# Altium PCB TDA7292 Amplifier.PcbDoc
Units mm, origin at the board's own origin, x right, y up, seen from the top; angles counter-clockwise.
Board outline 100 x 100 mm, 2 copper layers (Top Layer, Bottom Layer), stack 1.57 mm thick; 42 components, 25 nets, 95 pads, 2 vias.
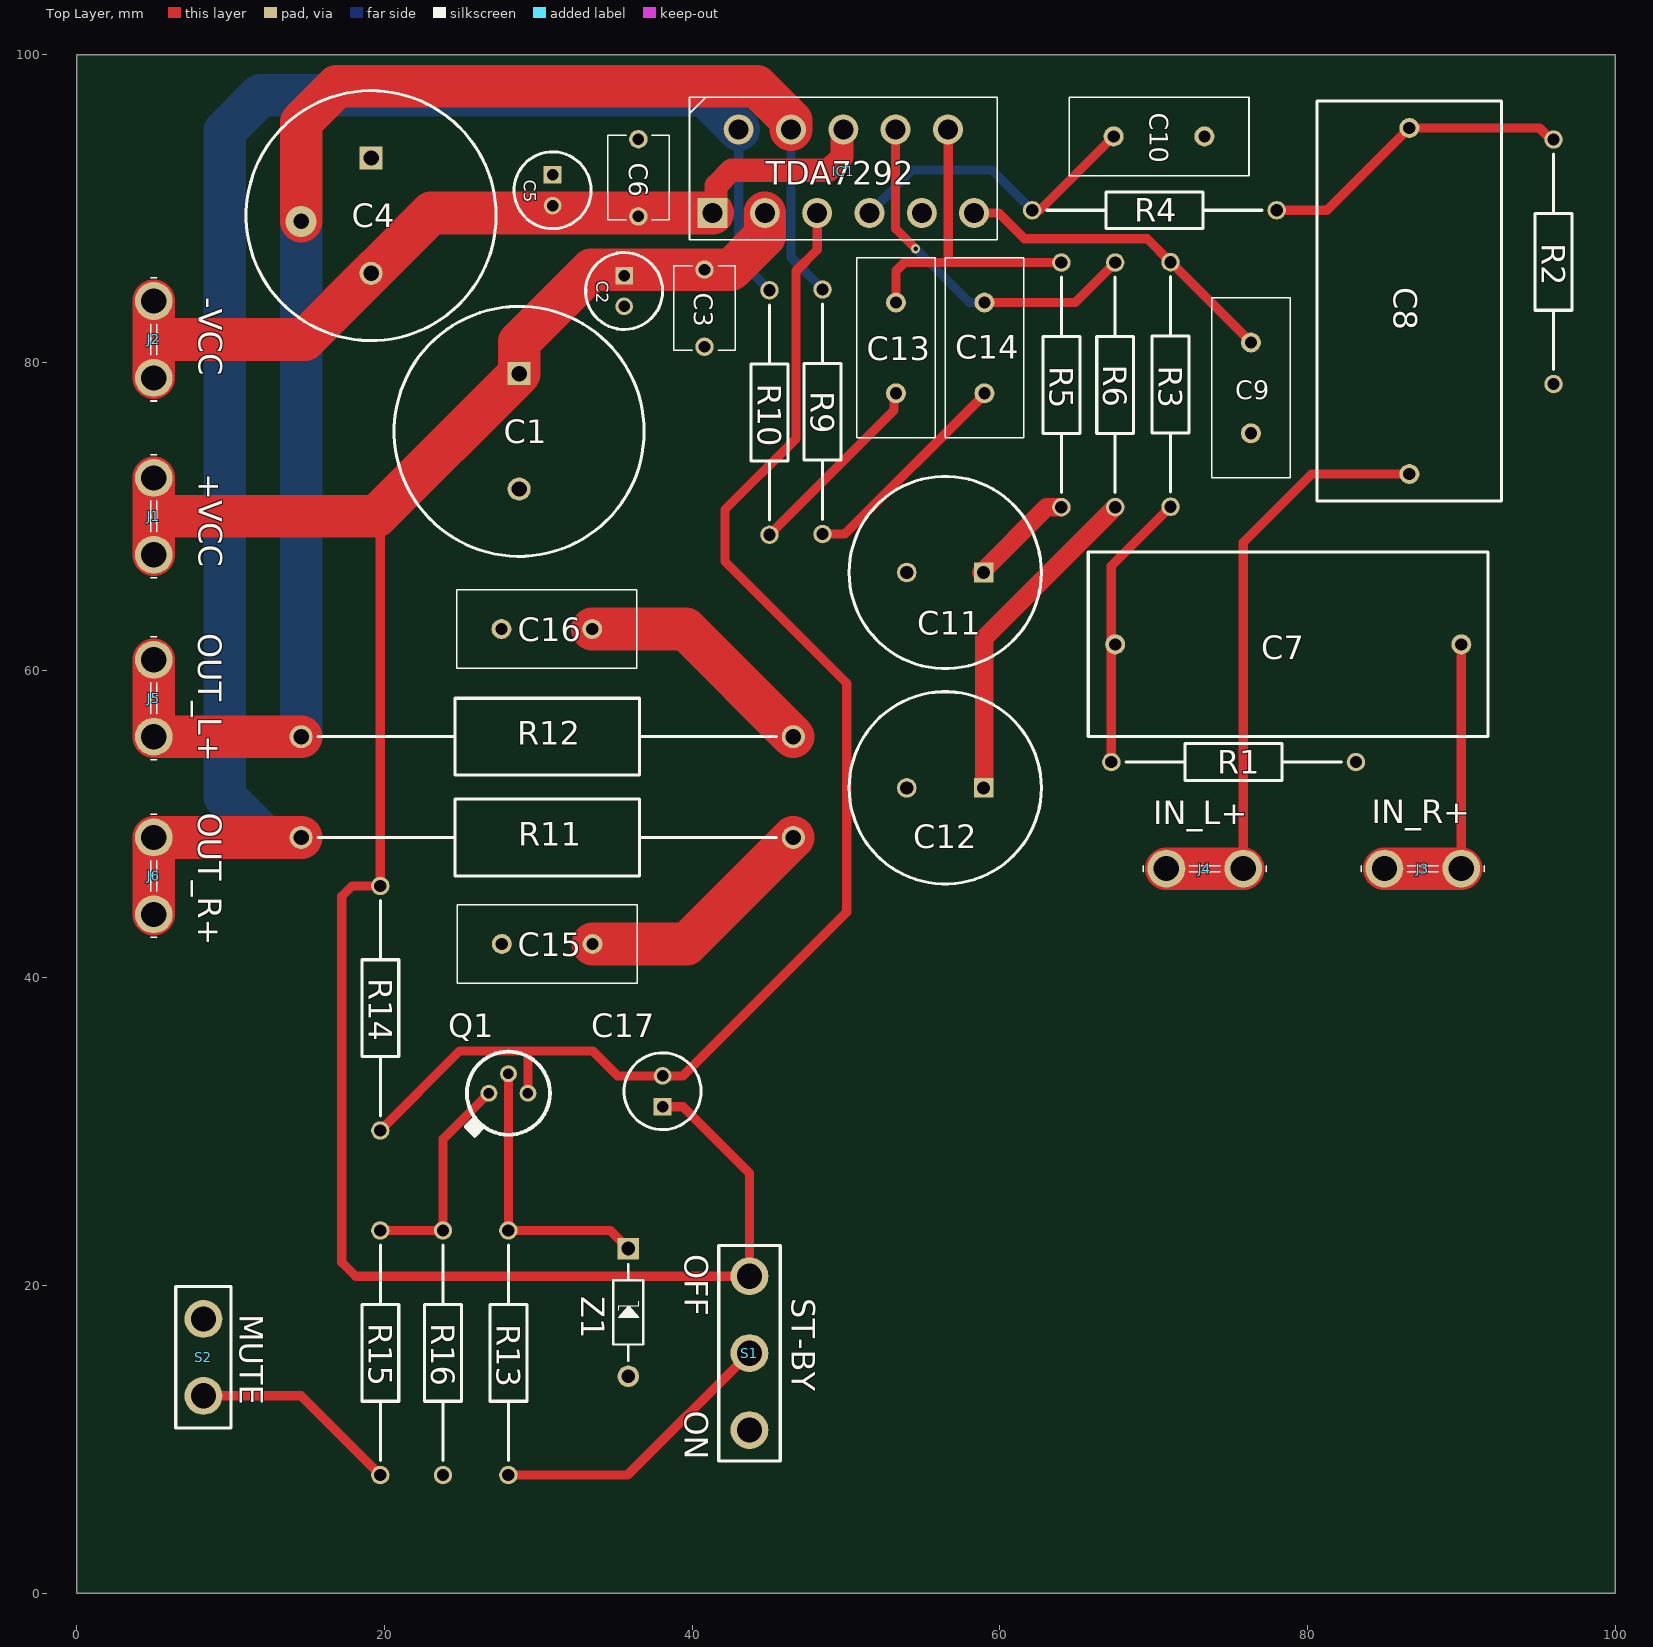
[diagram p0: Top Layer view]
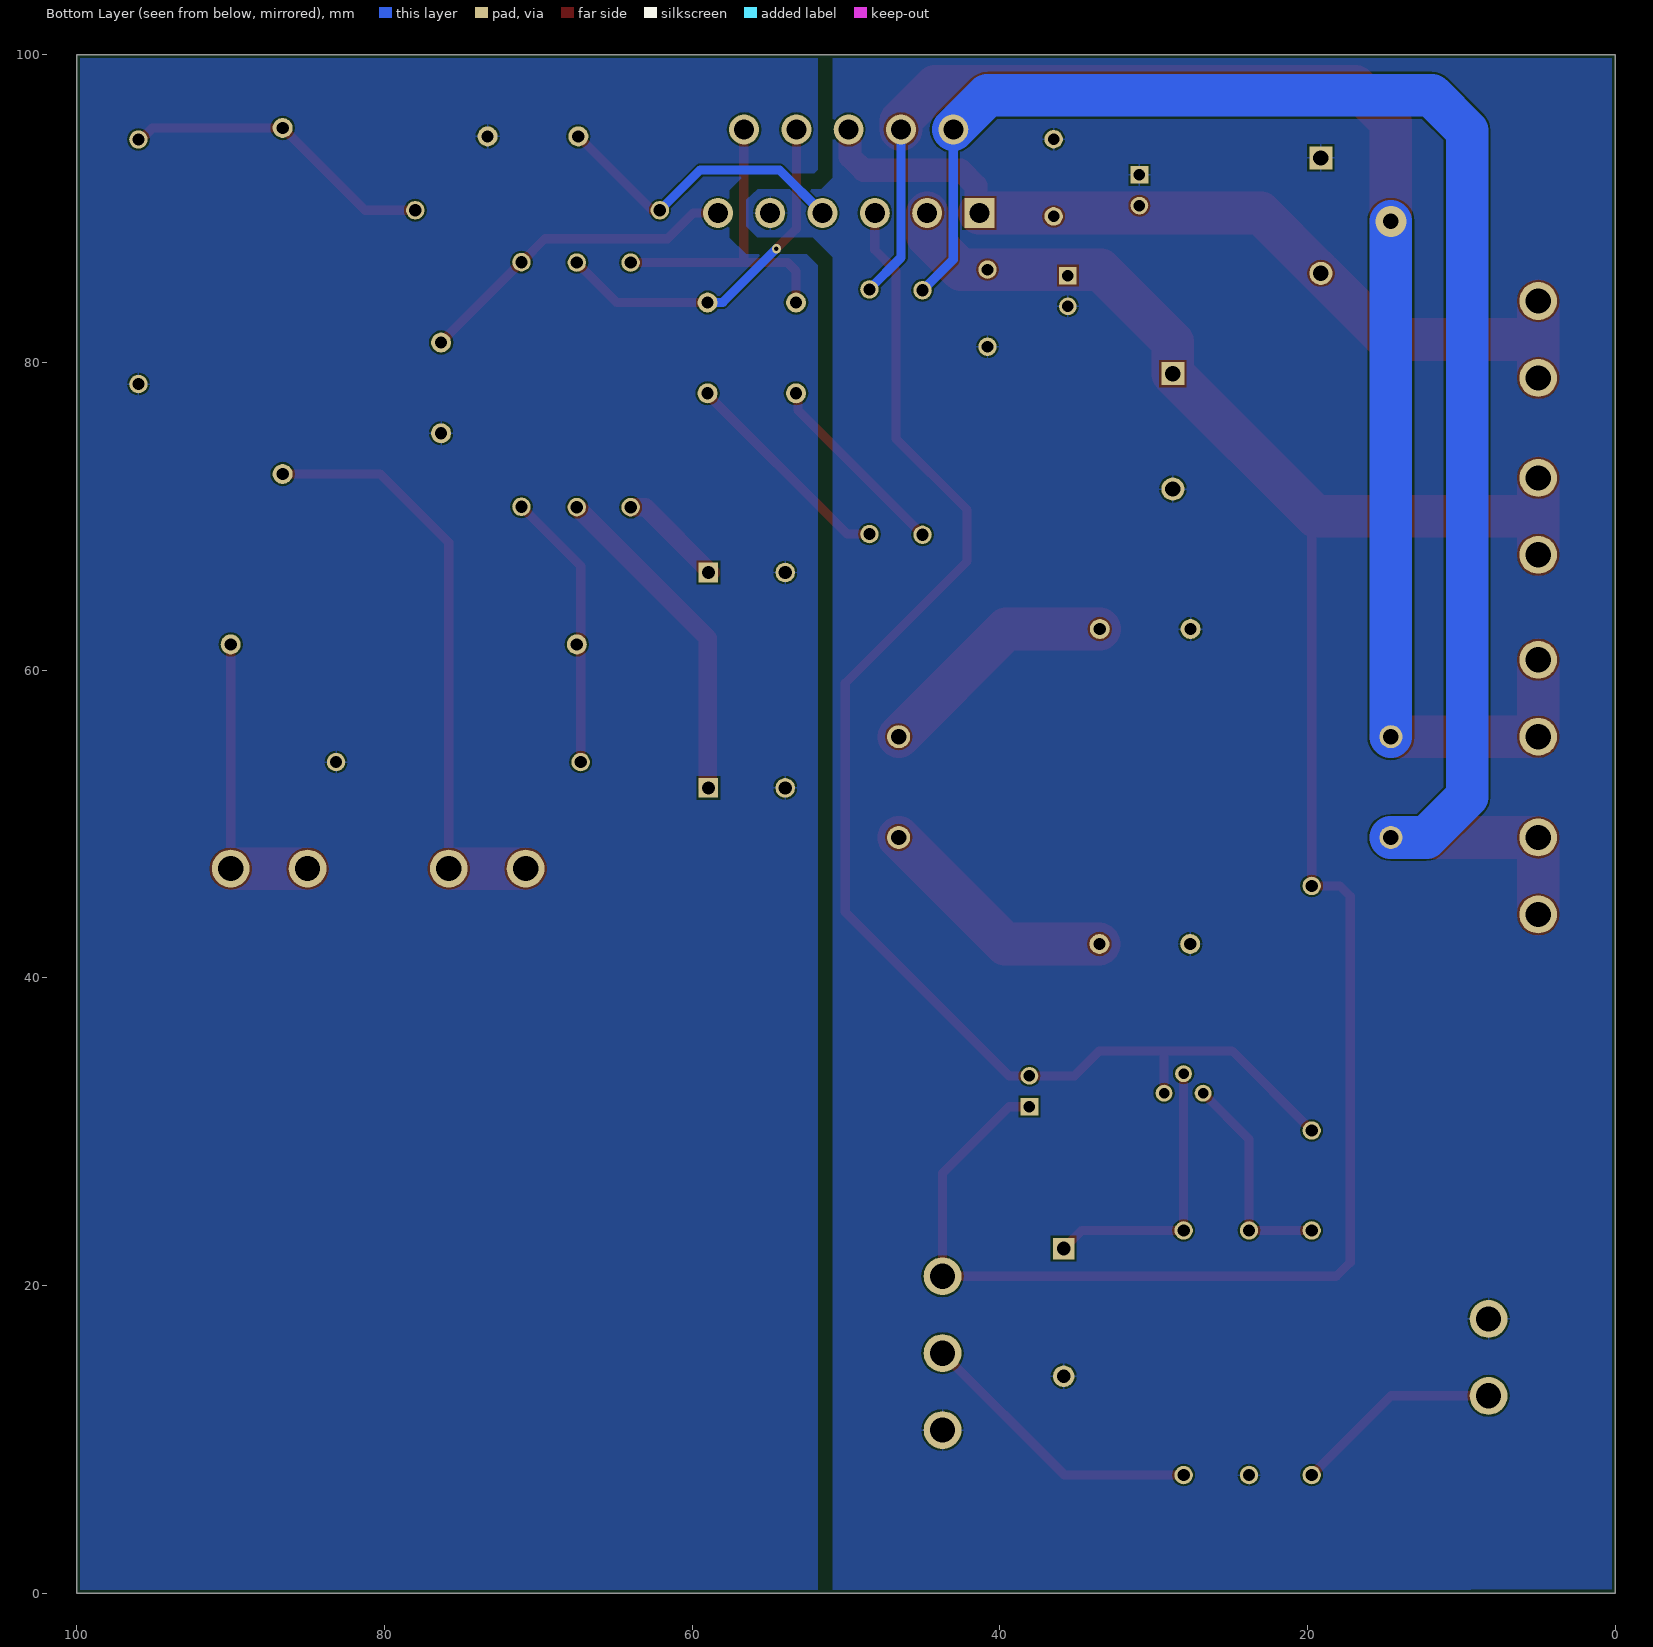
[diagram p1: Bottom Layer view, seen from below]
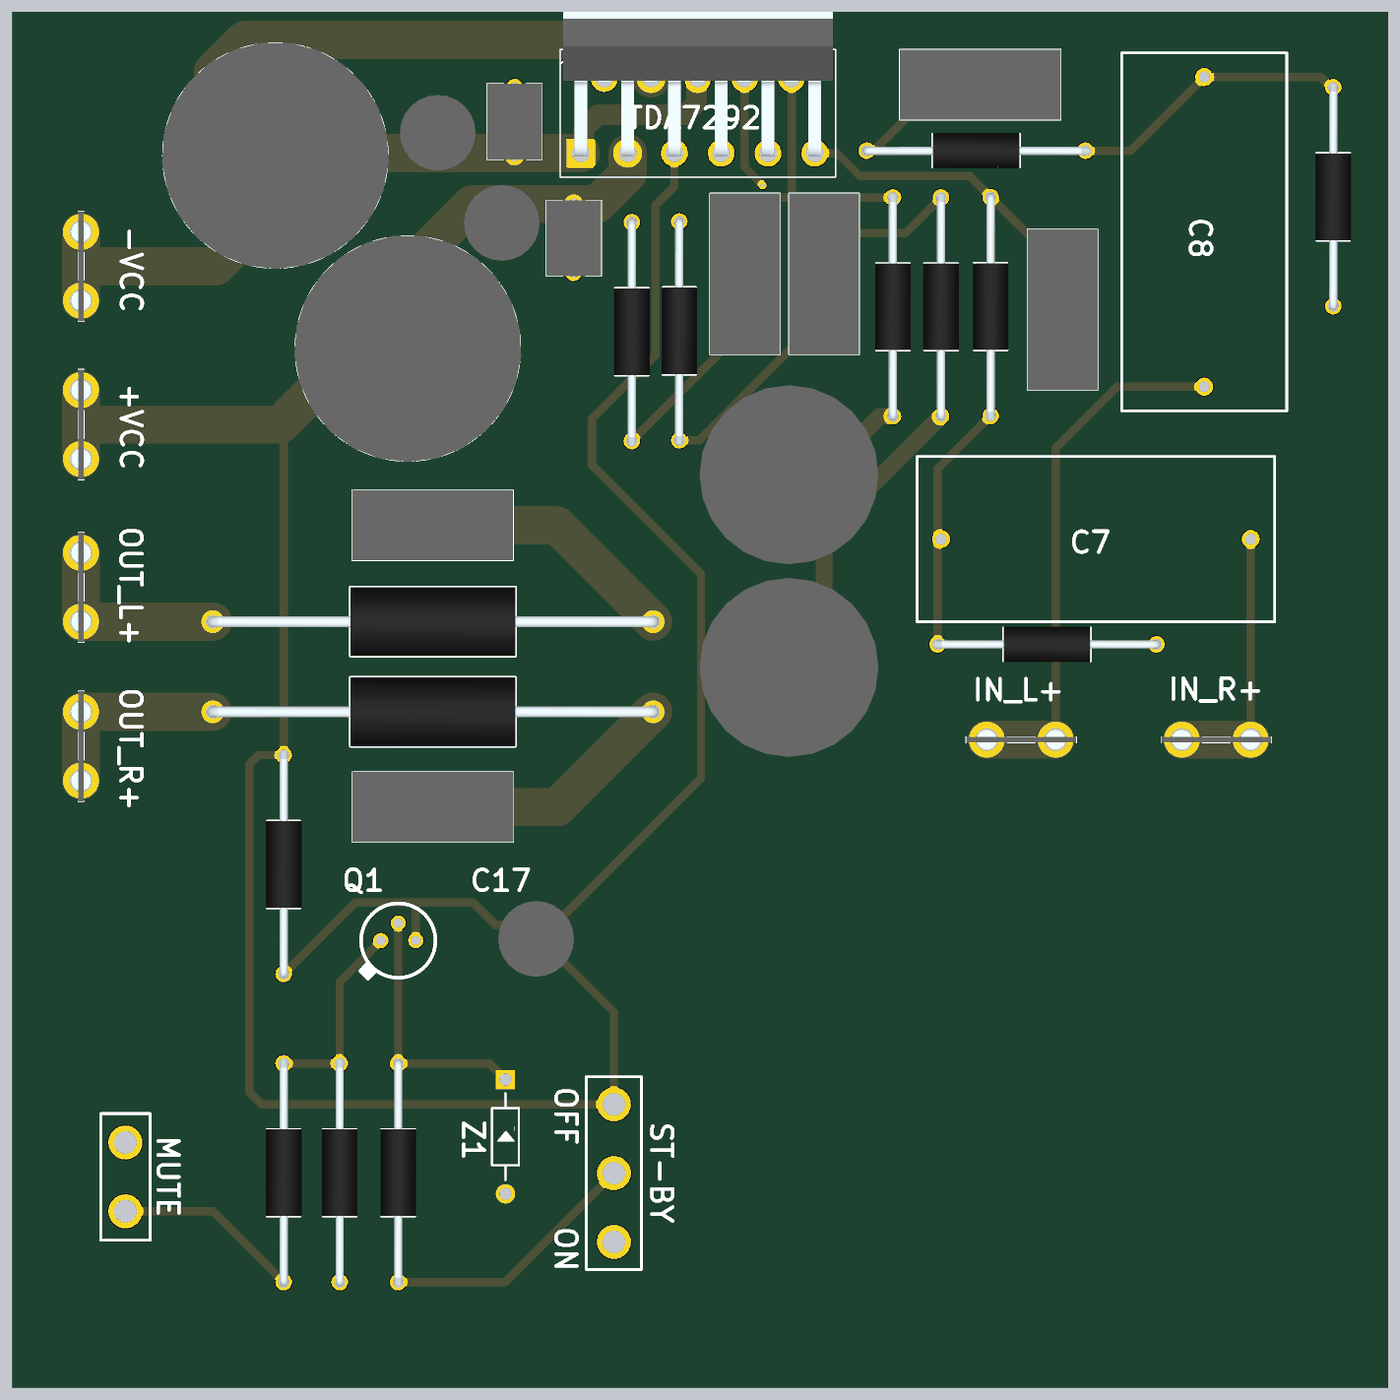
[diagram p2: 3D render of the assembled board from above, using the file's embedded part models]

## Layer stack, top to bottom
Top Solder: solder mask 0.013, Solder Resist, Dk 3.8
Top Layer: signal copper 0.035
Dielectric: core 1.5, FR-4, Dk 4.5
Bottom Layer: signal copper 0.035
Bottom Solder: solder mask 0.013, Solder Resist, Dk 3.8

## Board outline
0,0 0,100 100,100 100,0

## Design rules (kind name [scope] priority, off if disabled: settings)
BoardOutlineClearance [All] p1: gap=0.2 ignorepadtopadclearanceinfootprint=FALSE
Clearance [All] p1: gap=0.127 ignorepadtopadclearanceinfootprint=FALSE except(0.25: Arc-Hole Track-Hole SMDPad-Hole THPad-Hole Via-Hole Fill-Hole Poly-Hole Region-Hole Text-Hole)
ComponentClearance [All] p1: gap=0.127 collisioncheckmode=3 verticalgap=0.127 showdistances=TRUE
DiffPairsRouting [All] p1: maxlimit=0.254 minlimit=0.127 mostfreqgap=0.127 toplayer_minwidth=0.127 toplayer_maxwidth=25.4 toplayer_prefwidth=0.127 bottomlayer_minwidth=0.127 bottomlayer_maxwidth=25.4 bottomlayer_prefwidth=0.127 maxuncoupledlength=12.7
Height [All] p1: minheight=0 maxheight=1816.048 prefheight=12.7
HoleSize [All] p1: absolutevalues=TRUE maxlimit=6.3 minlimit=0.3 maxpercent=80.000 minpercent=20.000
HoleToHoleClearance [All] p1: gap=0.25 allowstackedmicrovias=FALSE
MinimumAnnularRing [All] p1: minimumring=0.077
MinimumSolderMaskSliver [All] p1: minsoldermaskwidth=0
PlaneClearance [All] p1: clearance=0.127
PlaneConnect PlaneConnectPowerPads [InPadClass('PowerPads')] p1: planeconnectstyle=Direct reliefexpansion=0.508 reliefentries=4 reliefconductorwidth=0.254 reliefairgap=0.254
PlaneConnect [All] p2: pad.planeconnectstyle=Relief pad.reliefexpansion=0.3 pad.reliefentries=4 pad.reliefconductorwidth=0.127 pad.reliefairgap=0.127 via.planeconnectstyle=Direct via.reliefexpansion=0.3 via.reliefentries=4 via.reliefconductorwidth=0.127 via.reliefairgap=0.127
PolygonConnect PolygonConnectPowerPads [All vs (InPadClass('PowerPads'))] p1: connectstyle=Direct reliefconductorwidth=0.254 reliefentries=4 polygonreliefangle="90 Angle" airgapwidth=0.254
PolygonConnect [All] p2: thpad.connectstyle=Relief thpad.reliefconductorwidth=0.127 thpad.reliefentries=4 thpad.polygonreliefangle="90 Angle" thpad.airgapwidth=0.127 smdpad.connectstyle=Relief smdpad.reliefconductorwidth=0.127 smdpad.reliefentries=4 smdpad.polygonreliefangle="90 Angle" smdpad.airgapwidth=0.127 via.connectstyle=Direct via.reliefconductorwidth=0.127 via.reliefentries=4 via.polygonreliefangle="90 Angle" via.airgapwidth=0.127
RoutingVias [All] p1: holewidth=0.3 width=0.6 viastyle="Through Hole" minholewidth=0.3 minwidth=0.6 maxholewidth=0.6 maxwidth=6.6
SilkToSilkClearance [All] p1: silktosilkclearance=0.127
SilkToSolderMaskClearance [IsPad] p1: minsilkscreentomaskgap=0.127 clearancetoexposedcopper=TRUE
SolderMaskExpansion [All] p1: expansion=0.075 istentingtop=FALSE
UnRoutedNet [All] p1: checkbadconnections=TRUE
Width [All] p1: maxlimit=25.4 minlimit=0.127 preferedwidth=0.3 minimp=50.000000 maximp=50.000000 favimp=50.000000
19 further rules are at their usual default settings.

## Components (designator, comment, footprint, x,y, rotation, side; value= is the part's Value field where it differs from the comment)
C1 "1000uF" "CAPACITOR 1000UF" 28.75,79.275 r270 top
C2 "22uF" "CAPACITOR 22UF" 35.575,85.65 r270 top
C3 "4.7uF X7R" "CAPACITOR 4.7UF 50V X7R" 40.8,86.025 r270 top
C4 "1000uF" "CAPACITOR 1000UF" 19.125,93.3 r270 top
C5 "22uF" "CAPACITOR 22UF" 30.925,92.2 r270 top
C6 "4.7uF X7R" "CAPACITOR 4.7UF 50V X7R" 36.5,94.5 r270 top
C7 "4.7uF PP" "4.7UF POLYPROPYLENE" 78.75,61.675 r180 top
C8 "4.7uF PP" "4.7UF POLYPROPYLENE" 86.625,84 r90 top
C9 "680pF Mica" "680PF MICA" 76.325,81.3 r270 top
C10 "680pF Mica" "680PF MICA" 67.4,94.7 r0 top
C11 "470uF" "CAPACITOR 470UF" 58.95,66.35 r180 top
C12 "470uF" "CAPACITOR 470UF" 58.95,52.35 r180 top
C13 "47pF Mica" "47PF MICA" 53.25,83.9 r270 top
C14 "47pF Mica" "47PF MICA" 59,83.9 r270 top
C15 "100nF Mica" "680PF MICA" 33.525,42.2 r180 top
C16 "100nF Mica" "680PF MICA" 33.5,62.675 r180 top
C17 "22uF" "CAPACITOR 22UF" 38.075,31.625 r90 top
IC1 "TDA7292" TDA7292 41.325,89.72 r0 top
J1 "+VCC" "SPADE TERMINALS" 5,72.5 r270 top
J2 "-VCC" "SPADE TERMINALS" 5,79 r90 top
J3 "IN_R+" "SPADE TERMINALS" 85,47.1 r0 top
J4 "IN_L+" "SPADE TERMINALS" 75.825,47.1 r180 top
J5 "OUT_L+" "SPADE TERMINALS" 5,55.675 r90 top
J6 "OUT_R+" "SPADE TERMINALS" 5,44.125 r90 top
Q1 "BC107B" TO-18 28.055,32.5 r270 top
R1 "18K" "RES 1/4W" 67.25,54.025 r0 top
R2 "18K" "RES 1/4W" 96,94.5 r270 top
R3 "1K" "RES 1/4W" 71.1,70.625 r90 top
R4 "1K" "RES 1/4W" 78,89.9 r180 top
R5 "560" "RES 1/4W" 64,86.5 r270 top
R6 "560" "RES 1/4W" 67.5,86.5 r270 top
R9 "18K" "RES 1/4W" 48.475,68.85 r90 top
R10 "18K" "RES 1/4W" 45.025,68.8 r90 top
R11 "4R7" "RES 1W" 14.575,49.125 r0 top
R12 "4R7" "RES 1W" 14.575,55.675 r0 top
R13 "10K" "RES 1/4W" 28.05,7.675 r90 top
R14 "15K" "RES 1/4W" 19.725,45.975 r270 top
R15 "15K" "RES 1/4W" 19.725,23.575 r270 top
R16 "47K" "RES 1/4W" 23.8,23.575 r270 top
S1 "ST-BY" SPDT 43.725,15.6 r90 top
S2 "MUTE" SPST 8.225,17.825 r270 top
Z1 "5.1V" "DO-35 ZENER" 35.85,22.4 r270 top value=Value

## Footprints (in the part's own frame and the unit in brackets; to place one, negate y for a bottom-side part, rotate by r counter-clockwise, add the part's x,y. Pads: shape width x height; smd on the part's side, far side on the other; paste and mask are expansions set on the pad)
"4.7UF POLYPROPYLENE" [mm]
  round 1.3 hole 0.8: 1(-11.25,0) 2(11.25,0)
  silkscreen extent -13,-6 13,6
"47PF MICA" [mm]
  round 1.3 hole 0.8: 1(0,0) 2(5.9,0)
  silkscreen extent -2.9,-2.55 8.8,2.55, body extent -2.9,-2.55 8.8,2.55, height 11.68
"680PF MICA" [mm]
  round 1.3 hole 0.8: 1(0,0) 2(5.9,0)
  silkscreen extent -2.9,-2.55 8.8,2.55, body extent -2.9,-2.55 8.8,2.55, height 11.68
"CAPACITOR 4.7UF 50V X7R" [mm]
  round 1.2 hole 0.75: 1(-0.02,0) 2(5,0)
  silkscreen extent -0.27,-2 5.23,2, body extent -0.29,-2 5.26,2, height 7.6
"CAPACITOR 22UF" [mm]
  rect 1.15x1.15 hole 0.75: 1(0,0)
  round 1.15 hole 0.75: 2(2,0)
  silkscreen extent -1.5,-2.5 3.5,2.5, body extent -1.75,-2.75 3.75,2.75, height 12.5
"CAPACITOR 470UF" [mm]
  rect 1.275x1.275 hole 0.85: 1(0,0)
  round 1.275 hole 0.85: 2(5,0)
  silkscreen extent -3.75,-6.25 8.75,6.25, body extent -4,-6.5 9,6.5, height 22
"CAPACITOR 1000UF" [mm]
  rect 1.5x1.5 hole 1: 1(0,0)
  round 1.5 hole 1: 2(7.5,0)
  silkscreen extent -4.37,-8.12 11.87,8.13, body extent -4.5,-8.25 12,8.25, height 27
"DO-35 ZENER" [mil]
  rect 55x55 hole 35 mask+0: 1(0,0)
  round 55 hole 35 mask+0: 2(327,0)
  silkscreen extent 39,-38 288,39, body extent 0,0 10,10, height 10
"RES 1/4W" [mm]
  round 1.2 hole 0.8: 1(0,0) 2(15.9,0)
  silkscreen extent 0.95,-1.2 14.95,1.2, body extent -0.3,-1.3 16.2,1.3, height 2.59
"RES 1W" [mm]
  round 1.5 hole 1: 1(0,0) 2(32,0)
  silkscreen extent 1.1,-2.5 30.9,2.5, body extent -0.4,-2.5 32.4,2.5, height 5
"SPADE TERMINALS" [mm]
  round 2.46 hole 1.64: 1(0,0) 2(5,0)
  silkscreen extent -1.5,-0.2 6.5,0.2, body extent -1.5,-0.72 6.5,0.72, height 13.2
SPDT [mm]
  round 2.46 hole 1.64: 1(-5,0) 2(5,0) 3(0,0)
  silkscreen extent -7,-2 7,2
SPST [mm]
  round 2.46 hole 1.64: 1(0,0) 2(5,0)
  silkscreen extent -2.1,-1.8 7.1,1.8
TDA7292 [mm]
  rect 1.95x1.95 hole 1.3: 1(0,0)
  round 1.95 hole 1.3: 2(1.7,5.43) 3(3.4,0) 4(5.1,5.43) 5(6.8,0) 6(8.5,5.43) 7(10.2,0) 8(11.9,5.43) 9(13.6,0) 10(15.3,5.43) 11(17,0)
  silkscreen extent -1.5,-1.75 18.5,7.53, body extent -1.3,-0.26 18.3,10.28, height 20.53
TO-18 [mm]
  round 1.1 hole 0.68: 1(-1.27,0) 2(0,1.27) 3(0,-1.27)
  silkscreen extent -2.7,-2.8 2.8,2.7

## Part data
C1 C4: "Electroletic Capacitor Polarised", Manufacturer_Name=Nichicon, Manufacturer_Part_Number=UHE1H102MHD6TN, Mouser Part Number=647-UHE1H102MHD6TN, Datasheet Link=http://nichicon-us.com/english/products/pdfs/e-uhe.pdf, Height=27mm, Mouser Price/Stock=https://www.mouser.com/Search/Refine.aspx?Keyword=647-UHE1H102MHD6TN
C2 C5 C17: "Electroletic Capacitor Polarised", Manufacturer_Name=Panasonic, Manufacturer_Part_Number=EEU-FM1H220, Mouser Part Number=667-EEU-FM1H220, Datasheet Link=https://industrial.panasonic.com/cdbs/www-data/pdf/RDF0000/ABA0000C1018.pdf, Height=12.5mm, Mouser Price/Stock=https://www.mouser.com/Search/Refine.aspx?Keyword=667-EEU-FM1H220
C3 C6: "Capacitor 4.7UF 50V X7R", Manufacturer_Name="Murata Electronics", Manufacturer_Part_Number=RCER71H475K3M1H03A, Mouser Part Number=81-RCER71H475K3M1H3A, Datasheet Link=https://psearch.en.murata.com/capacitor/product/RCER71H475K3M1H03A.html, Height=7.5mm, Mouser Price/Stock=https://www.mouser.com/Search/Refine.aspx?Keyword=81-RCER71H475K3M1H3A
C7 C8: "Cap Film 4.7uF 450VDC PP 5% (25.3 X 11.7 X 16.4mm) Radial 22.5mm 110C Bulk", Capacitance=4.7uF, Case/Package=Radial, Dielectric=PP, Manufacturer=Panasonic, Manufacturer Part Number=ECW-FD2W475J, Max Operating Temperature=110°C, Min Operating Temperature=-40°C, Package Quantity=100, Supplier Part Number 1=P16728-ND, Tolerance=5%, Voltage=450V, Category="Film Capacitors", ComponentLink1Description=https://datasheet.ciiva.com/30042/abd0000ce52-30042702.pdf?src-supplier=Avnet, ComponentLink1URL=https://datasheet.ciiva.com/30042/abd0000ce52-30042702.pdf?src-supplier=Avnet, Contact Plating=Tin, Depth=11.7mm, Dielectric Material=PP, Height=16.4mm, Height - Seated (Max)=0.646inch, Lead Diameter=0.8mm, Lead Pitch=22.5mm, Lead/Base Style=Straight, Length=25.3mm, Mount="Through Hole", Number of Pins=2, Packaging=Bulk, Pricing 1="1=1.26000, 10=0.99800, 100=0.74880, 500=0.56576, 1000=0.49920, 2500=0.46592, 5000=0.44928 (USD)", REACH SVHC=Unknown, RoHS=Yes, Stock 1=1224, Supplier 1=Digi-Key, Termination=Radial, Voltage Rating=450V, Voltage Rating (DC)=450V, Width=11.7mm
C9 C10: "Capacitor 680pF Mica", Manufacturer_Name="Cornell Dubilier", Manufacturer_Part_Number=CD15FD221FO3F, Mouser Part Number=598-CD15FD221FO3F, RS Part Number=8713331, Allied Price/Stock=https://www.alliedelec.com/cornell-dubilier-cd15fd221fo3f/70190178/, Allied_Number=70190178, Datasheet Link=https://componentsearchengine.com/Datasheets/2/CD15FD221FO3F.pdf, Height=11.681mm, Mouser Price/Stock=https://www.mouser.com/Search/Refine.aspx?Keyword=598-CD15FD221FO3F, RS Price/Stock=http://uk.rs-online.com/web/p/products/8713331
C11 C12: "Electroletic Capacitor Polarised", Manufacturer_Name=Panasonic, Manufacturer_Part_Number=EEUFM1H471, RS Part Number=5261698P, Datasheet Link=https://industrial.panasonic.com/cdbs/www-data/pdf/RDF0000/ABA0000C1018.pdf, Height=22mm, RS Price/Stock=http://uk.rs-online.com/web/p/products/5261698P
C13 C14: "Capacitor 47pF Mica", Manufacturer_Name="Cornell Dubilier", Manufacturer_Part_Number=CD15FD221FO3F, Mouser Part Number=598-CD15FD221FO3F, RS Part Number=8713331, Allied Price/Stock=https://www.alliedelec.com/cornell-dubilier-cd15fd221fo3f/70190178/, Allied_Number=70190178, Datasheet Link=https://componentsearchengine.com/Datasheets/2/CD15FD221FO3F.pdf, Height=11.681mm, Mouser Price/Stock=https://www.mouser.com/Search/Refine.aspx?Keyword=598-CD15FD221FO3F, RS Price/Stock=http://uk.rs-online.com/web/p/products/8713331
C15 C16: library part "680pF Mica", "Capacitor 680pF Mica", Manufacturer_Name="Cornell Dubilier", Manufacturer_Part_Number=CD15FD221FO3F, Mouser Part Number=598-CD15FD221FO3F, RS Part Number=8713331, Allied Price/Stock=https://www.alliedelec.com/cornell-dubilier-cd15fd221fo3f/70190178/, Allied_Number=70190178, Datasheet Link=https://componentsearchengine.com/Datasheets/2/CD15FD221FO3F.pdf, Height=11.681mm, Mouser Price/Stock=https://www.mouser.com/Search/Refine.aspx?Keyword=598-CD15FD221FO3F, RS Price/Stock=http://uk.rs-online.com/web/p/products/8713331
IC1: "Integrated Circuit", Manufacturer_Name=STMicroelectronics, Mouser Part Number=511-TDA7292, Datasheet Link=http://www.st.com/content/ccc/resource/technical/document/datasheet/1a/b1/d0/90/8b/8d/40/fe/CD00236549.pdf/files/CD00236549.pdf/jcr:content/translations/en.CD00236549.pdf, Height=5mm, Manufacturer_Part_Number=TDA7292, Mouser Price/Stock=https://www.mouser.com/Search/Refine.aspx?Keyword=511-TDA7292
J1 J2 J3 J4 J5 J6: library part "Spade Terminals", "Connector", Manufacturer_Name="TE Connectivity", Manufacturer_Part_Number=725964-2, Mouser Part Number=571-725964-2, RS Part Number=1640091, Allied Price/Stock=https://www.alliedelec.com/teconnectivity-725964-2/70285916/, Allied_Number=70285916, Datasheet Link=https://www.te.com/commerce/DocumentDelivery/DDEController?Action=showdoc&DocId=Customer+Drawing%7F725964%7FD2%7Fpdf%7FEnglish%7FENG_CD_725964_D2.pdf%7F725964-2, Height=13.1mm, Mouser Price/Stock=https://www.mouser.com/Search/Refine.aspx?Keyword=571-725964-2, RS Price/Stock=http://uk.rs-online.com/web/p/products/1640091
Q1: "Transistor BJT NPN", Manufacturer_Name=STMicroelectronics, Mouser Part Number=511-BC107B, RS Part Number=7140489P, Datasheet Link=http://docs-emea.rs-online.com/webdocs/0e77/0900766b80e779e3.pdf, Manufacturer_Part_Number=BC107B, Mouser Price/Stock=https://www.mouser.com/Search/Refine.aspx?Keyword=511-BC107B, RS Price/Stock=http://uk.rs-online.com/web/p/products/7140489P
R1 R2 R3 R4 R5 R6 R9 R10 R13 R14 R15 R16: library part "Resistor 1/4W", "Resistor", Manufacturer_Name="YAGEO (PHYCOMP)", Manufacturer_Part_Number=CFR-25JT-52-1K, Mouser Part Number=603-CFR-25JT-52-1K, Datasheet Link=http://www.yageo.com/NewPortal/yageodocoutput?fileName=/pdf/throughhole/Yageo_LR_CFR_2013.pdf, Mouser Price/Stock=https://www.mouser.com/Search/Refine.aspx?Keyword=603-CFR-25JT-52-1K
R11 R12: library part "Resistor 1W", "Resistor 1W", Manufacturer_Name=Ohmite, Manufacturer_Part_Number=OM2405E-R58, Mouser Part Number=588-OM2405E-R58, Datasheet Link=https://www.mouser.com/datasheet/2/942/SF_AGH_Series-1508337.pdf, Mouser Price/Stock=https://www.mouser.com/Search/Refine.aspx?Keyword=588-OM2405E-R58
S1: library part SW-SPDT, "SPDT Subminiature Toggle Switch, Right Angle Mounting, Vertical Actuation", ComponentLink1Description="Manufacturer Link", ComponentLink1URL=http://www.apem.com, DatasheetVersion=05-Dec-2000, LatestRevisionDate=17-Dec-2003, LatestRevisionNote="Schematic revised, PCB Footprint replaced.", PackageDescription="Switch; 4 Leads", PackageReference=TL36WW15050, Published=24-Mar-1999, Publisher="Altium Limited"
S2: library part SW-SPST, "Single-Pole, Single-Throw Switch", LatestRevisionDate=17-Jul-2002, LatestRevisionNote="Re-released for DXP Platform.", PackageDescription="Switch; 2 Leads", PackageReference=SPST-2, Published=24-Mar-1999, Publisher="Altium Limited"
Z1: library part Zener, "Zener Diode 5.1V", Manufacturer_Part_Number=BZX55C5V1-TAP, Built_By=EMA_UL_Team, Copyright="Copyright (C) 2018 Accelerated Designs. All rights reserved", RefDes=RefDes, Type=DEV, Vendor=Vishay

## Via types
v1: diameter 0.6, hole 0.3, Top Layer to Bottom Layer, 1 vias
v2: diameter 2, hole 1, Top Layer to Bottom Layer, 1 vias

## Nets (pads, with @x,y where several pads share a name; then routed paths per layer and width w, separated by ;. In a path a pad name is that pad's centre, name@x,y a point inside that pad or via, vN(x,y) a via of type N, cw(c..) or ccw(c..) an arc to the next point about the centre after c; other vN are vias at no path point)
+VS: C1.1 C2.1 C3.1 C17.1 IC1.3 J1.1 J1.2 R14.1 S1.2 | length 146.7
  Top Layer w0.6: 19.475,70 19.725,69.75 R14.1 17.9,45.975 17.225,45.3 17.225,21.5 18.125,20.6 S1.2 43.725,27.3 39.4,31.625 C17.1
  Top Layer w2.77: J1.2 5,70 ; J1.1 5,70 ; IC1.3 44.725,88.225 42.52,86.02 40.8,86.02 35.575,86.02 33.43,86.02 28.75,81.34 C1.1 19.475,70 5,70
-VS: C4.2 C5.2 C6.2 IC1.1 IC1.6 J2.1 J2.2 | length 57
  Top Layer w1.5: IC1.1 41.55,89.945 41.55,91.5 42.55,92.5 48.86,92.5 49.739,93.379 49.739,95.064 IC1.6
  Top Layer w2.77: J2.1 5,81.5 ; J2.2 5,81.5 ; C4.2 14.825,81.5 5,81.5 ; C4.2@19.412,86.087 23.045,89.72 30.925,89.72 36.5,89.72 IC1.1
GND: C1.2 C2.2 C3.2 C4.1 C5.1 C6.1 C15.2 C16.2 IC1.9 R16.2 S1.1 S2.1 Z1.2
IN+(1): C9.1 IC1.11 R3.2 | length 21.4
  Top Layer w0.6: IC1.11 59.93,89.72 61.599,88.051 69.574,88.051 R3.2 71.125,86.525 C9.1@76.3,81.35
IN+(2): C10.1 IC1.7 R4.2 | length 20.1
  Top Layer w0.6: R4.2 62.6,89.9 C10.1
  Bottom Layer w0.6: IC1.7 54.33,92.525 54.95,92.525 59.475,92.525 R4.2
IN-(1): C13.1 IC1.10 R5.1 | length 21.8
  Top Layer w0.6: C13.1 53.25,85.95 53.8,86.5 56.65,86.5 ; IC1.10@56.55,95.175 IC1.10@56.575,95.15 ; IC1.10 IC1.10@56.575,95.15 ; R5.1 56.65,86.5 ; IC1.10@56.575,95.15 56.65,95.075 56.65,86.5
IN-(2): C14.1 IC1.8 R6.1 | length 23.8
  Top Layer w0.6: IC1.8 53.225,88.701 54.525,87.401 v1(54.525,87.4) ; C14.1 64.9,83.9 R6.1
  Bottom Layer w0.6: v1@54.526,87.401 58.017,83.909 58.991,83.909 C14.1
IN_L+: C8.1 J4.1 J4.2 | length 38.8
  Top Layer w0.6: J4.1 75.825,68.3 80.275,72.75 C8.1
  Top Layer w2.77: J4.2 J4.1
IN_R+: C7.1 J3.1 J3.2 | length 19.6
  Top Layer w0.6: J3.2 C7.1
  Top Layer w2.77: J3.1 J3.2
MUTE: C17.2 IC1.5 Q1.2 R14.2 | length 91.5
  Top Layer w0.6: R14.2 24.9,35.25 29.325,35.25 ; Q1.2 29.325,35.25 ; IC1.5 48.125,87.325 46.75,85.95 46.75,75.05 42.125,70.425 42.125,67.075 50.05,59.15 50.05,44.275 39.4,33.625 C17.2 35.15,33.625 33.525,35.25 29.325,35.25
NetC7_2: C7.2 R1.1 R3.1 | length 18.2
  Top Layer w0.6: R1.1 67.25,62.5 67.25,66.775 R3.1
NetC8_2: C8.2 R2.1 R4.1 | length 20.5
  Top Layer w0.6: R4.1 81.275,89.9 C8.2 95.088,95.25 95.838,94.5 R2.1
NetC11_1: C11.1 R5.2 | length 7
  Top Layer w1.2: C11.1@58.8,66.35 63.05,70.6 R5.2
NetC12_1: C12.1 R6.2 | length 21.8
  Top Layer w1.2: C12.1 58.987,52.387 58.987,62.087 R6.2
NetC13_2: C13.2 R10.1 | length 12.6
  Top Layer w0.6: R10.1 53.116,76.891 53.116,77.866 C13.2
NetC14_2: C14.2 R9.1 | length 14.4
  Top Layer w0.6: R9.1 49.925,68.85 59,77.925 C14.2
NetC15_1: C15.1 R11.2 | length 15.9
  Top Layer w2.77: C15.1 39.65,42.2 R11.2
NetC16_1: C16.1 R12.2 | length 16
  Top Layer w2.77: C16.1 39.575,62.675 R12.2
NetQ1_1: Q1.1 R13.2 Z1.1 | length 18.5
  Top Layer w0.6: Q1.1 28.053,33.768 28.053,23.578 R13.2 34.675,23.575 Z1.1
NetQ1_3: Q1.3 R15.1 R16.1 | length 14.2
  Top Layer w0.6: R15.1 R16.1 23.8,29.515 Q1.3
NetR13_1: R13.1 S1.3 | length 19
  Top Layer w0.6: R13.1 35.8,7.675 S1.3
NetR15_2: R15.2 S2.2 | length 13.6
  Top Layer w0.6: S2.2 14.575,12.825 R15.2
Out(1): IC1.2 J6.1 J6.2 R10.2 R11.1 | length 110.5
  Top Layer w2.77: J6.1 J6.2 R11.1
  Bottom Layer w0.6: IC1.2 43.025,86.7 R10.2
  Bottom Layer w2.77: R11.1 12.275,49.125 9.625,51.775 9.625,95.075 11.925,97.375 40.8,97.375 IC1.2
Out(2): IC1.4 J5.1 J5.2 R9.2 R12.1 | length 100.1
  Top Layer w2.77: J5.2 J5.1 R12.1 ; v2(14.575,89.175) 14.575,95.625 16.9,97.95 44.202,97.95 46.425,95.727 IC1.4
  Bottom Layer w0.6: IC1.4 46.425,86.825 R9.2@48.488,84.763
  Bottom Layer w2.77: R12.1 v2(14.575,89.175)
SGND: C9.2 C10.2 C11.2 C12.2 R1.2 R2.2

## Polygon pours and split planes (outlines as drawn)
GND on Bottom Layer "GND_L02_P001" (solid, pour order 1): 0,0.25 0,100 50.85,100 50.85,92.025 51.625,91.25 53,91.25 55.75,91.25 56.475,90.581 56.475,88.85 55.775,88.15 52.15,88.15 50.85,86.85 50.85,0
SGND on Bottom Layer "SGND_L02_P000" (solid, pour order 0): 51.825,92.525 52.05,92.3 56.475,92.3 57.575,91.2 57.575,88.125 56.5,87.05 52.55,87.05 51.825,86.325 51.825,0 100,0 100,100 51.825,100

## Silkscreen, mask and mechanical layers (free items; w line width, h text height)
Top Overlay:
  text "OFF" at 39.504,22.021 h1.52 r270
  text "ON" at 39.504,11.846 h1.52 r270